# Altium PCB pll_layout.PcbDoc
Units mm, origin at the board's own origin, x right, y up, seen from the top; angles counter-clockwise.
Board outline 90.2 x 57.63 mm, 2 copper layers (Top Layer, Bottom Layer); 46 components, 26 nets, 131 pads, 180 vias.
Unrouted connection lines stored in the file: 1.
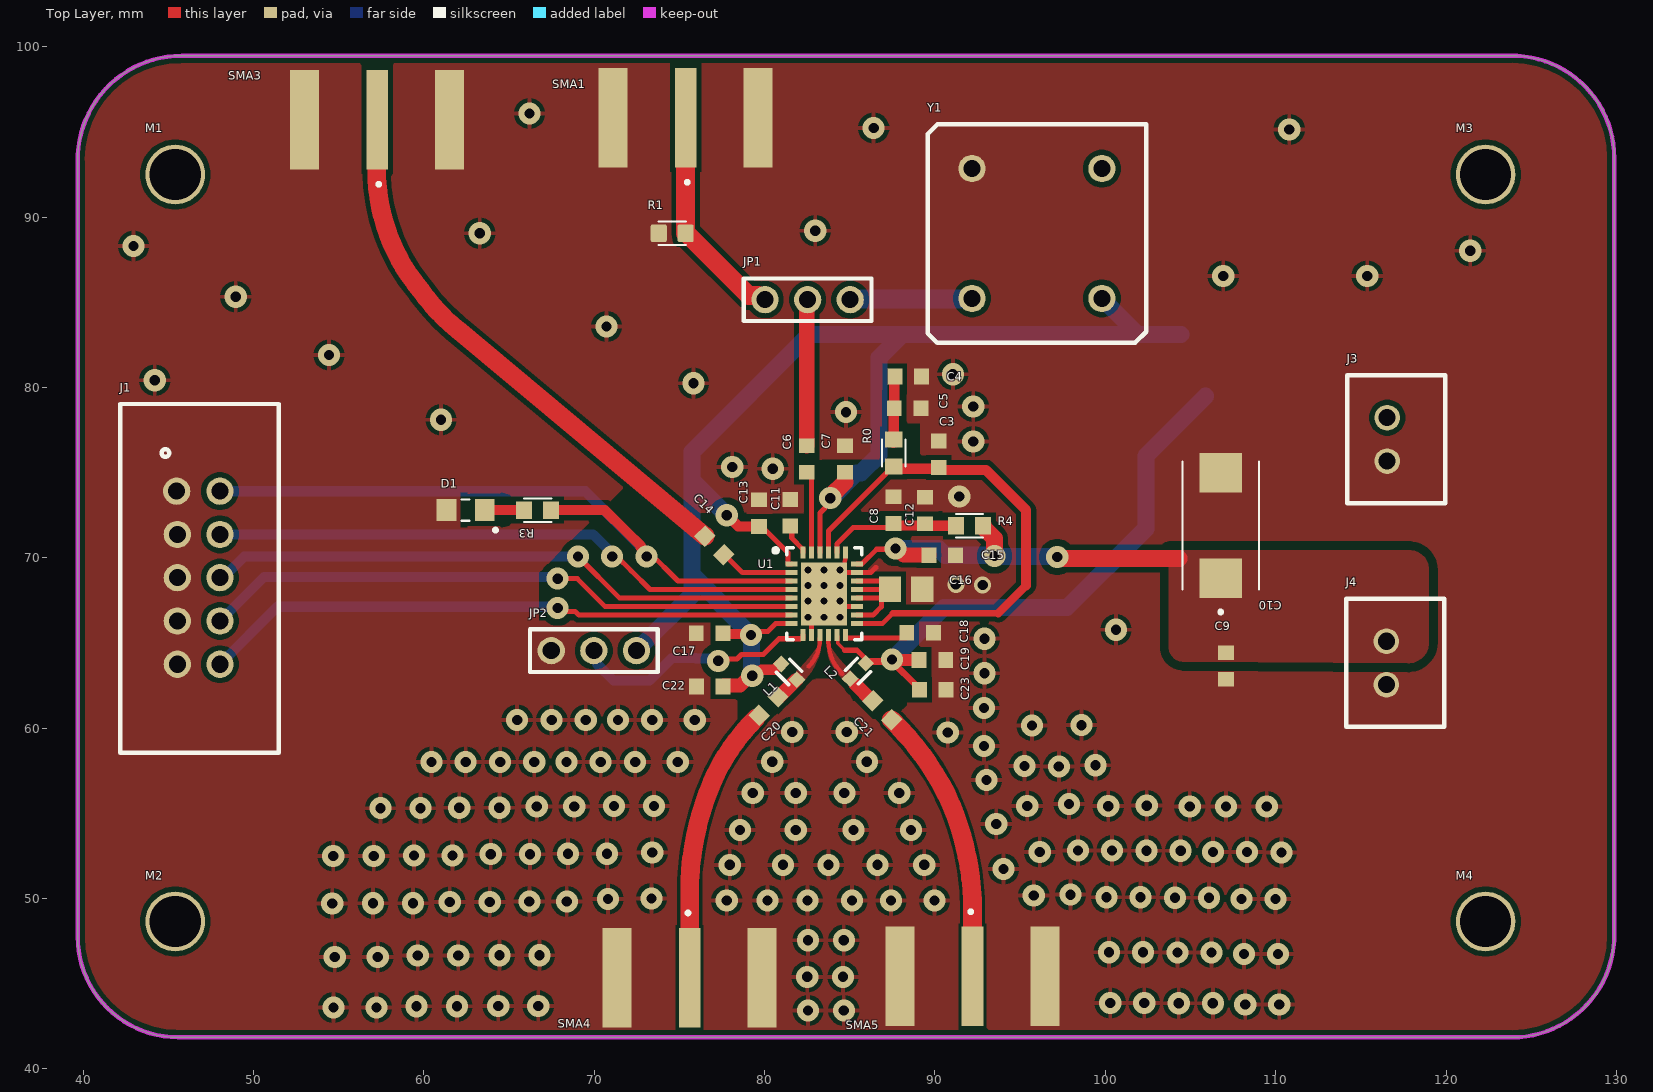
[diagram p0: Top Layer view]
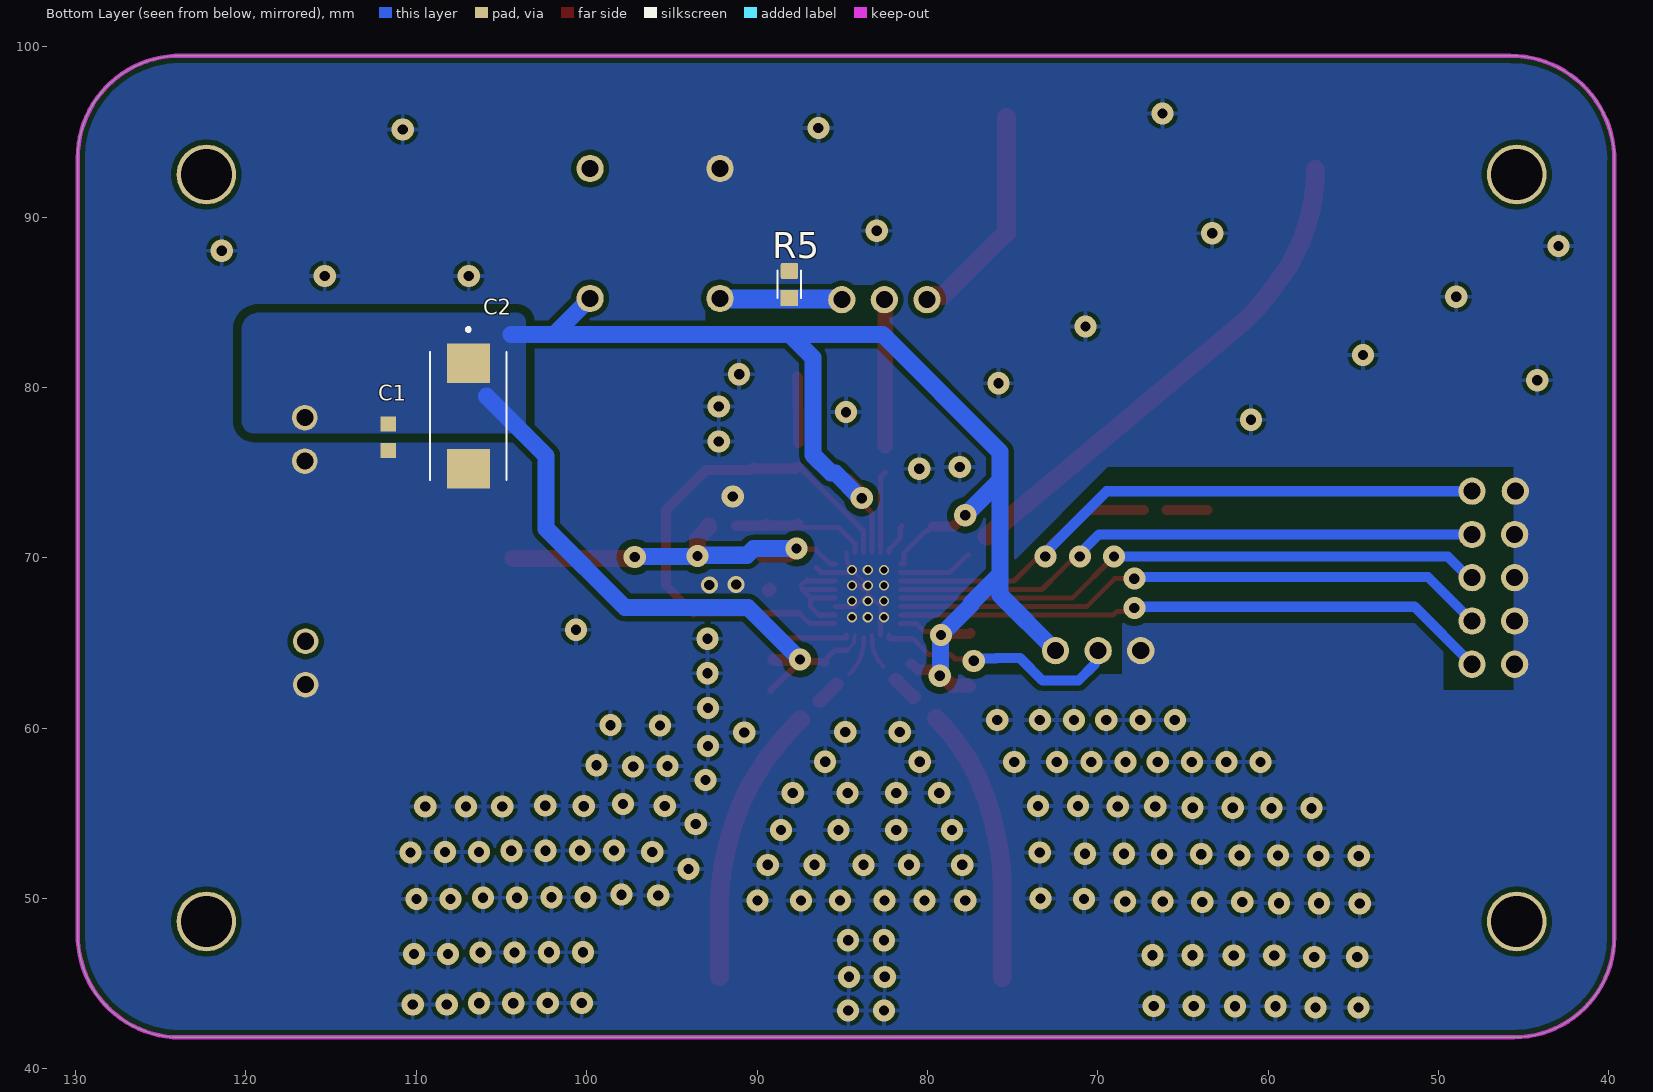
[diagram p1: Bottom Layer view, seen from below]
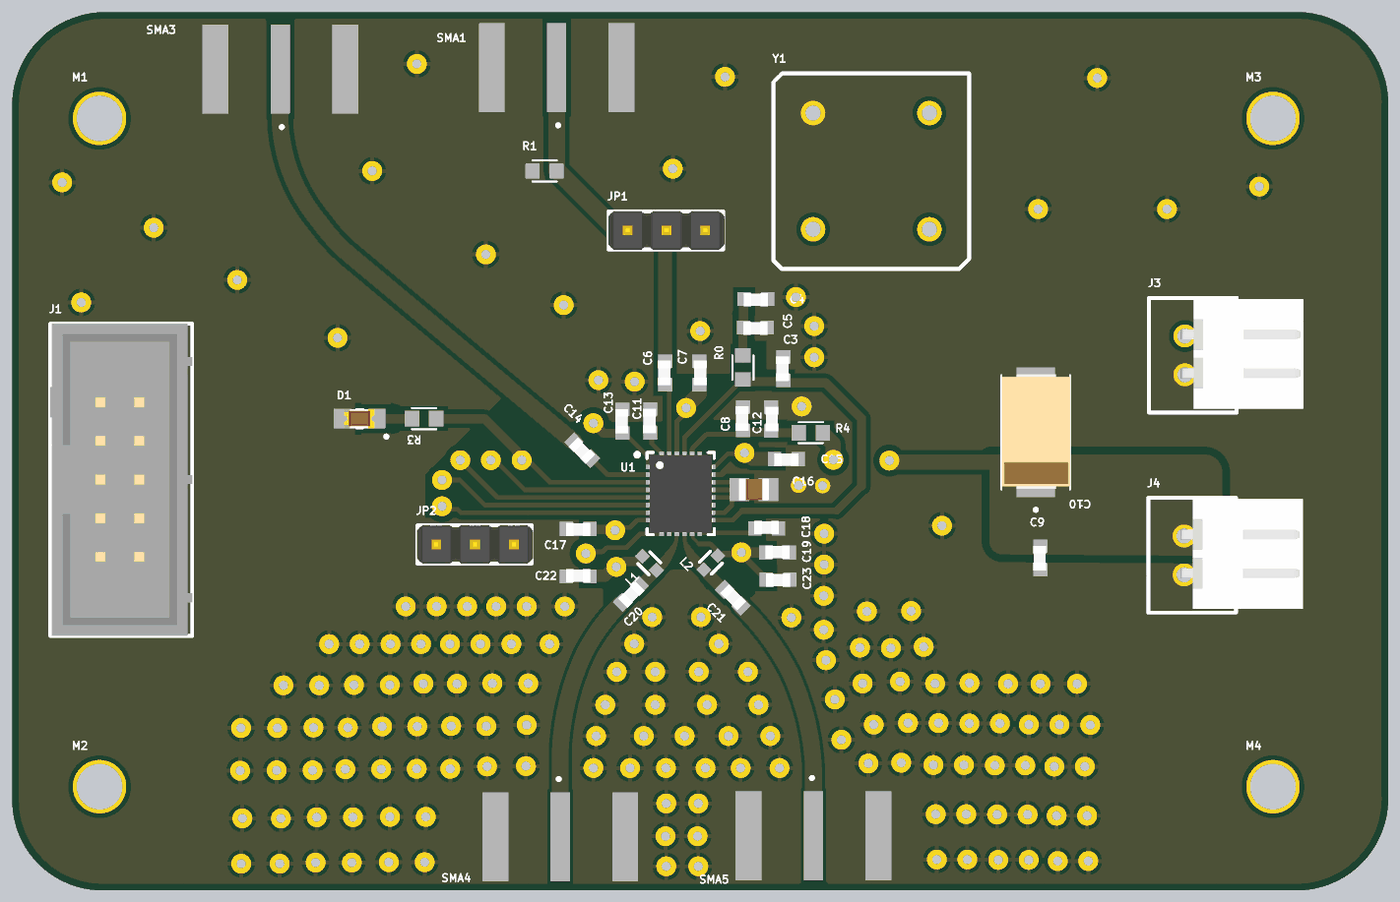
[diagram p2: 3D render of the assembled board from above, using the file's embedded part models]

## Layer stack, top to bottom
Top Solder: solder mask 0.0102, Solder Resist, Dk 3.5
Top Layer: signal copper 0.0356
Dielectric 1: dielectric 0.32, FR-4, Dk 4.8
Bottom Layer: signal copper 0.0356
Bottom Solder: solder mask 0.0102, Solder Resist, Dk 3.5

## Board outline
45.575,41.85 cw(c45.575,47.75) 39.675,47.75 39.675,93.275 39.676,93.269 cw(c45.775,93.375) 45.775,99.475 122.475,99.475 123.775,99.475 cw(c123.88,93.476) 129.88,93.476 129.875,93.475 129.875,47.95 cw(c123.876,47.845) 123.876,41.845 123.875,41.85

## Design rules (kind name [scope] priority, off if disabled: settings)
Clearance C21_1_Clearance [InNet('NetC21_1') vs OnLayer('Top Layer')] p1: gap=0.2 ignorepadtopadclearanceinfootprint=TRUE
Clearance C20_1_Clearance [InNet('NetC20_1') vs OnLayer('Top Layer')] p2: gap=0.2 ignorepadtopadclearanceinfootprint=TRUE
Clearance Clearance_1 [InNamedPolygon('NETC21_2_L01_P004')] p3: gap=0.3 ignorepadtopadclearanceinfootprint=TRUE
Clearance clear_rf [InNamedPolygon('NETC20_2_L01_P002')] p4: gap=0.3 ignorepadtopadclearanceinfootprint=TRUE
Clearance STD_Clearance [All] p5: gap=0.3 ignorepadtopadclearanceinfootprint=TRUE except(0.2: Arc-Arc Arc-Track Arc-SMDPad Arc-THPad Arc-Text Track-Track Track-SMDPad Track-THPad Track-Text SMDPad-THPad SMDPad-Text THPad-THPad THPad-Text Via-Text Fill-Text Poly-Text Region-Text Text-Text; 0.4: Via-Fill Via-Poly Via-Region; 0.5: SMDPad-SMDPad Fill-Fill Fill-Poly Fill-Region Poly-Poly Poly-Region Region-Region)
HoleSize [All] p1: absolutevalues=TRUE maxlimit=3.5 minlimit=0.4 maxpercent=80.000 minpercent=20.000
PlaneClearance [All] p1: clearance=0.6
PolygonConnect [All] p1: connectstyle=Direct reliefconductorwidth=0.254 reliefentries=4 polygonreliefangle="90 Angle" airgapwidth=0.254
RoomDefinition pll_schematic [InComponentClass('pll_schematic')] p1: confinementstyle=ConfineOut formatcopy=TRUE lockcomponents=FALSE outline 0,0 50.8,0 50.8,25.4 0,25.4
RoutingVias [All] p1: holewidth=0.6 width=0.6 viastyle="Through Hole" minholewidth=0.2 minwidth=0.5 maxholewidth=4 maxwidth=1.6
SolderMaskExpansion [All] p1: expansion=0 istentingtop=FALSE
Width [All] p1: maxlimit=2 minlimit=0.2 preferedwidth=0.254 minimp=50.000000 maximp=50.000000 favimp=50.000000
28 further rules are at their usual default settings.

## Components (designator, comment, footprint, x,y, rotation, side; value= is the part's Value field where it differs from the comment)
C1 "1uF" C0603 111.65,77.075 r90 bottom
C2 "330uF" C_TANT_D 106.95,78.325 r270 bottom
C3 "2.7nF" C0603 90.225,76.075 r270 top
C4 "22nF" C0603 88.43,80.65 r0 top
C5 "6.8nF" C0603 88.395,78.775 r0 top
C6 "1uF" C0603 82.475,75.8 r270 top
C7 "10nF" C0603 84.725,75.8 r90 top
C8 "1uF" C0603 87.575,72.8 r270 top
C9 "1uF" C0603 107.075,63.65 r270 top
C10 "330uF" C_TANT_D 106.775,71.9 r90 top
C11 "1uF" C0603 81.5,72.645 r270 top
C12 "10nF" C0603 89.425,72.775 r90 top
C13 "100nF" C0603 79.675,72.625 r270 top
C14 "22nF" C0603 77.048,70.727 r315 top
C15 "10nF" C0603 90.425,70.15 r0 top
C16 "2.2uF" C0805 88.3,68.15 r0 top
C17 "100nF" C0603 76.77,65.575 r0 top
C18 "1uF" C0603 89.125,65.6 r180 top
C19 "10nF" C0603 89.85,64 r180 top
C20 "100pF" C0603 80.225,61.3 r45 top
C21 "100pF" C0603 86.9,61.05 r135 top
C22 "100nF" C0603 76.775,62.45 r180 top
C23 "100nF" C0603 89.875,62.25 r0 top
D1 "-" D0805 62.45,72.8 r180 top
J1 "-" IDC-2x05 48.025,63.75 r180 top
J3 "-" JST_XH_1X02 116.55,76.95 r0 top
J4 "-" JST_XH_1X02 116.5,63.825 r0 top
JP1 "-" PIN_HEADER_1x03 82.525,85.15 r270 top
JP2 "-" PIN_HEADER_1x03 69.975,64.55 r270 top
L1 "68nH" L0402 81.44,63.31 r315 top
L2 "68nH" L0402 85.475,63.35 r45 top
M1 "MOUNTING_HOLE" MOUNTING_HOLE_NP_M3 45.4,92.5 r0 top
M2 "MOUNTING_HOLE" MOUNTING_HOLE_NP_M3 45.4,48.65 r0 top
M3 "MOUNTING_HOLE" MOUNTING_HOLE_NP_M3 122.325,92.5 r0 top
M4 "MOUNTING_HOLE" MOUNTING_HOLE_NP_M3 122.325,48.65 r0 top
R0 "453R" R0603#1 87.575,76.15 r270 top
R1 "51.1R" R0603#2 74.575,89.05 r0 top
R3 "330R" R0603#1 66.675,72.8 r0 top
R4 "15R" R0603#1 92.025,71.875 r0 top
R5 "51.1R" R0603#3 88.1,86.05 r90 bottom
SMA1 "-" SMA 75.362,95.843 r180 top
SMA3 "-" SMA 57.25,95.725 r180 top
SMA4 "-" SMA 75.6,45.35 r0 top
SMA5 "-" SMA 92.2,45.425 r0 top
U1 "LTC6946" QFN50P400X500X80_HS-29N_2 83.494,67.882 r0 top
Y1 "-" XOSC 95.975,89.025 r180 top

## Footprints (in the part's own frame and the unit in brackets; to place one, negate y for a bottom-side part, rotate by r counter-clockwise, add the part's x,y. Pads: shape width x height; smd on the part's side, far side on the other; paste and mask are expansions set on the pad)
C0603 [mm]
  rect 0.87x0.93 smd: 1(-0.78,0) 2(0.78,0)
  body extent -0.8,-0.48 0.8,0.38, height 0.83
C0805 [mm]
  rect 1.3x1.5 smd: 1(-0.95,0) 2(0.95,0)
  body extent -1,-0.72 1,0.73, height 1.22
C_TANT_D [mm]
  rect 2.31x2.52 smd: 1(-3.1,0) 2(3.1,0)
  silkscreen extent -5.18,-2.25 3.75,2.25, body extent -3.7,-2.27 3.8,2.22, height 3.15
D0805 [mm]
  rect 1.15x1.3 smd: A(-1.125,0) C(1.125,0)
  silkscreen extent -1.85,-0.63 0.23,1.27, body extent -0.97,-0.62 1.03,0.63, height 1.1
IDC-2x05 [mm]
  round 1.6 hole 1: 1(2.54,-10.16) 2(0,-10.16) 3(2.5,-7.62) 4(0,-7.62) 5(2.5,-5.08) 6(0,-5.08) 7(2.5,-2.54) 8(0,-2.54) 9(2.5,0) 10(0,0)
  silkscreen extent -3.45,-15.28 5.85,5.2, body extent -3.45,-15.3 5.85,5.2, height 9.1
JST_XH_1X02 [mm]
  round 1.5 hole 1: 1(0,1.275) 2(0,-1.275)
  silkscreen extent -2.35,-3.75 3.4,3.77, body extent -0.25,-3.51 7.79,3.71, height 5.84
L0402 [mm]
  rect 0.7x0.7 smd: 1(-0.65,0) 2(0.65,0)
  silkscreen extent -0.5,-0.55 0.5,0.55
MOUNTING_HOLE_NP_M3 [mm]
  round 3.5 hole 3: 1(0,0)
PIN_HEADER_1x03 [mm]
  round 1.6 hole 1: 1(0,2.5) 2(0,0) 3(0,-2.5)
  silkscreen extent -1.25,-3.75 1.25,3.75, body extent -1.27,-3.77 1.27,3.85, height 9.5
QFN50P400X500X80_HS-29N_2 [mm] "QFN, 28-Leads, Body 4.00x5.00mm, Pitch 0.50mm, Thermal Pad 2.70x3.70mm, IPC Medium Density"
  rect 0.7x0.3 smd: 1(-1.925,1.75) 2(-1.925,1.25) 3(-1.925,0.75) 4(-1.925,0.25) 5(-1.925,-0.25) 6(-1.925,-0.75) 7(-1.925,-1.25) 8(-1.925,-1.75) 15(1.925,-1.75) 16(1.925,-1.25) 17(1.925,-0.75) 18(1.925,-0.25) 19(1.925,0.25) 20(1.925,0.75) 21(1.925,1.25) 22(1.925,1.75)
  rect 0.3x0.7 smd: 9(-1.25,-2.425) 10(-0.75,-2.425) 11(-0.25,-2.425) 12(0.25,-2.425) 13(0.75,-2.425) 14(1.25,-2.425) 23(1.25,2.425) 24(0.75,2.425) 25(0.25,2.425) 26(-0.25,2.425) 27(-0.75,2.425) 28(-1.25,2.425)
  rect 2.7x3.7 smd: 29(0,0)
  silkscreen extent -2.97,-2.7 2.2,2.7, body extent -2.1,-2.6 2.1,2.6, height 0.8
R0603#1 [mm]
  rect 0.94x1.02 smd: 1(-0.79,0) 2(0.79,0)
  silkscreen extent -0.8,-0.69 0.8,0.69
R0603#2 [mm]
  rrect20% 0.94x1.02 smd: 1(-0.79,0) 2(0.79,0)
  silkscreen extent -0.8,-0.69 0.8,0.69
R0603#3 [mm]
  rect 0.94x1.02 smd: 1(-0.79,0)
  rrect20% 0.94x1.02 smd: 2(0.79,0)
  silkscreen extent -0.8,-0.69 0.8,0.69
SMA [mil]
  rect 50x230 smd: 1(0,0)
  rect 67x230 smd: 2(-167.5,0) 2(167.5,0)
  silkscreen extent -8,146 0,154
XOSC [mm]
  round 1.6 hole 1: 1(-3.825,-3.825) 4(3.8,-3.825) 5(3.8,3.8) 8(-3.825,3.8)
  silkscreen extent -6.43,-6.43 6.4,6.4

## Part data
C1 C3 C4 C5 C6 C7 C8 C9 C11 C12 C13 C14 C15 C16 C17 C18 C19 C20 C21 C22 C23: library part C
C2 C10: library part CP
D1: library part LED
J1: library part Conn_Gene_1x10
J3 J4: library part Conn_Gene_1x02
JP1 JP2: library part "Pin Header 1x03"
L1 L2: library part L
M1 M2 M3 M4: "Non-Plated"
R0 R1 R3 R4 R5: library part R
SMA1 SMA3 SMA4 SMA5: library part SMA
U1: library part LTC6946IUFD-1#PBF-ND, ComponentLink1Description=LTC6946, ComponentLink1URL=https://www.digikey.com/en/products/detail/analog-devices-inc/LTC6946IUFD-1-PBF/2756832
Y1: library part OSC

## Via types
v1: diameter 1.3, hole 0.6, Top Layer to Bottom Layer, 166 vias
v2: diameter 0.6, hole 0.4, Top Layer to Bottom Layer, 12 vias
v3: diameter 1, hole 0.6, Top Layer to Bottom Layer, 2 vias

## Nets (pads, with @x,y where several pads share a name; then routed paths per layer and width w, separated by ;. In a path a pad name is that pad's centre, name@x,y a point inside that pad or via, vN(x,y) a via of type N, cw(c..) or ccw(c..) an arc to the next point about the centre after c; other vN are vias at no path point)
3.3V: C1.2 C2.1 C7.1 C13.2 C17.2 C19.2 C22.1 C23.1 J3.1 JP2.1 L1.1 L2.2 U1.1 U1.8 U1.13 U1.26 Y1.8 | length 123.6
  Top Layer w0.2: U1.13 84.294,65.407 84.294,64.981 84.7,64.575 ; C19.2@89.032,64.037 C19.2
  Top Layer w0.3: v1(79.2,65.475) 79.391,65.666 80.181,65.666 80.646,66.131 U1.8 ; C13.2@79.825,71.725 79.99,71.56 80.11,71.56 81.369,70.301 81.369,69.631 U1.1 ; U1.26 83.244,72.624 83.85,73.229 v1(83.85,73.5) ; 84.7,64.575 85.425,64.575 85.935,64.065 L2.2
  Top Layer w0.4: L2.2 86.147,63.81 86.247,63.91 87.36,63.91 v1(87.475,64.025) 87.475,63.92 88.93,62.465 88.96,62.465 89.195,62.23 C23.1@89.195,62.2
  Top Layer w0.6: C17.2@77.47,65.575 77.52,65.525 79.15,65.525 v1(79.2,65.475) ; v1(77.775,72.5) 77.795,72.5 78.45,71.845 C13.2 ; v1(79.275,63.075) 79.464,63.075 79.814,63.425 80.566,63.425 80.91,63.769 L1.1
  Top Layer w0.7: v1(87.475,64.025) 87.487,64.013 89.008,64.013 C19.2@89.032,64.037
  Top Layer w0.8: C22.1 77.555,62.465 77.59,62.5 78.565,62.5 79.14,63.075 v1(79.275,63.075)
  Top Layer w1: v1(83.85,73.5) 83.85,73.581 84.725,74.456
  Bottom Layer w1: JP2.1 75.75,67.825 75.75,69.025 ; v1(77.775,72.5) 75.75,74.525 ; v1(79.275,63.075) 79.237,63.113 79.237,65.437 77.446,67.229 77.446,67.329 75.75,69.025 ; v1(83.85,73.5) 83.931,73.5 85.403,74.972 85.647,74.972 86.725,76.05 86.725,81.75 88.075,83.1 ; v1(87.475,64.025) 90.525,67.075 97.75,67.075 102.375,71.7 102.375,75.975 105.884,79.484 ; Y1.8 101.925,83.1 ; 104.45,83.1 101.925,83.1 ; 75.75,69.025 75.75,74.525 ; 75.75,74.525 75.75,76.225 82.625,83.1 88.075,83.1 ; 88.075,83.1 101.925,83.1
5V: C9.1 C10.1 C15.1 J4.1 R4.2 U1.22 | length 23.7
  Top Layer w0.3: U1.22 85.705,69.631 86.577,70.504 87.629,70.504 v1(87.677,70.552)
  Top Layer w0.9: v1(87.677,70.552) 87.785,70.552 88.172,70.165 89.63,70.165 C15.1
  Top Layer w1: R4.2@92.845,71.865 92.845,71.78 93.492,71.133 93.492,70.108 v1(93.5,70.1) ; v1(97.175,70.05) 97.232,69.993 97.445,69.993 97.487,69.95 104.329,69.95
  Bottom Layer w1: v1(87.677,70.552) 90.198,70.552 90.6,70.15 93.45,70.15 93.525,70.075 97.15,70.075 v1(97.175,70.05)
CP: C3.2 R0.2 U1.15 U1.25 | length 30.6
  Top Layer w0.3: U1.25 83.744,71.569 87.335,75.16 R0.2@87.41,75.16 ; U1.15 86.906,66.131 87.525,66.75
  Top Layer w0.4: 87.525,66.75 93.725,66.75
  Top Layer w0.5: 93.725,66.75 95.35,68.375
  Top Layer w0.6: R0.2 87.71,75.225 90.155,75.225 C3.2 90.36,75.16 90.731,75.16 90.741,75.15 93,75.15 95.35,72.8 95.35,68.375
CS': J1.4 U1.4 | length 34.9
  Top Layer w0.3: v1@71.05,70.25 71.146,70.25 71.661,69.735 71.665,69.735 72.167,69.233 73.268,68.131 U1.4
  Bottom Layer w0.4: J1.4 J1.4@48.06,71.335
  Bottom Layer w0.6: J1.4@48.06,71.335 48.095,71.37 69.93,71.37 v1@71.05,70.25
  other v1: 71.05,70.075
GND: C1.1 C2.2 C3.1 C4.2 C5.2 C7.2 C8.1 C9.2 C10.2 C11.1 C12.2 C13.1 C15.2 C16.2 C17.1 C18.1 C19.1 C22.2 C23.2 D1.C J1.1 J1.3 J1.5 J1.7 J1.9 J3.2 J4.2 JP2.3 R1.1 R5.2 SMA1.2 SMA3.2 SMA4.2 SMA5.2 U1.10 U1.17 U1.21 U1.23 U1.29 Y1.4 | length 10.5
  Top Layer w0.2: U1.29@82.744,66.507 82.744,67.131 U1.29 ; U1.29@84.244,67.131 U1.29 ; v2(84.419,69.281) 84.394,69.281 v2(83.494,68.381) U1.29
  Top Layer w0.254: v2(84.419,69.281) ccw(c83.635,70.066) 84.546,69.433 ccw(c83.635,70.066) 84.744,70.066 U1.23
  Top Layer w0.3: U1.10 U1.29@82.744,66.507 ; U1.29@83.744,68.131 U1.29@84.207,68.594 ; U1.29@84.244,67.131 U1.17 ; U1.29@84.719,69.132 86.231,69.132 86.527,69.427
  Top Layer w0.8: C16.2 C16.2@89.309,68.091
  other v1: 82.55,43.425 84.65,43.425 54.687,43.597 57.212,43.597 59.562,43.672 61.937,43.672 64.362,43.697 66.712,43.697 108.213,43.772 110.213,43.772 104.313,43.847 106.313,43.847 100.288,43.872 102.288,43.872 82.5,45.4 84.6,45.4 54.762,46.572 57.287,46.572 59.637,46.647 62.012,46.647 64.437,46.672 66.787,46.672 108.138,46.747 110.138,46.747 104.238,46.822 106.238,46.822 100.213,46.847 102.213,46.847 82.55,47.55 84.65,47.55 54.614,49.699 57.014,49.724 59.364,49.724 61.514,49.799 63.864,49.799 66.189,49.824 68.389,49.824 77.775,49.875 80.175,49.875 82.525,49.875 85.125,49.875 87.425,49.875 89.975,49.875 107.988,49.972 109.988,49.972 70.802,49.977 73.352,50.002 104.088,50.047 106.088,50.047 100.063,50.072 102.063,50.072 95.8,50.175 97.95,50.225 94.027,51.727 77.95,51.975 81.075,51.975 83.75,51.975 86.625,51.975 89.375,51.975 54.675,52.501 57.05,52.501 59.425,52.526 61.675,52.526 63.925,52.601 66.225,52.601 68.45,52.626 70.75,52.626 73.4,52.7 110.348,52.699 96.148,52.723 106.323,52.724 108.323,52.724 102.423,52.799 104.423,52.799 98.398,52.824 100.398,52.824 78.55,54.025 81.825,54.025 85.225,54.025 88.598,54.025 93.6,54.375 57.452,55.302 59.802,55.302 62.077,55.327 64.427,55.327 66.627,55.402 68.827,55.402 104.958,55.4 107.083,55.4 109.477,55.4 71.152,55.427 73.502,55.427 95.418,55.422 100.173,55.42 102.428,55.449 97.875,55.547 79.3,56.189 81.825,56.189 84.68,56.189 87.902,56.189 93.018,56.948 97.273,57.748 95.248,57.773 99.425,57.825 60.451,58.008 62.451,58.008 64.476,58.008 66.476,58.008 68.376,58.008 70.376,58.008 72.401,58.008 74.901,58.008 80.45,58.025 86,58.025 92.873,58.948 90.75,59.75 81.625,59.777 84.822,59.777 95.7,60.15 98.6,60.175 65.473,60.477 67.498,60.477 69.498,60.477 71.398,60.477 73.398,60.477 75.898,60.477 92.875,61.175 92.9,63.225 92.9,65.25 100.625,65.775 91.425,73.6 80.475,75.225 78.1,75.325 92.25,76.825 61,78.1 84.775,78.55 92.25,78.875 75.825,80.25 44.2,80.425 91.05,80.775 54.425,81.9 70.725,83.575 48.95,85.325 106.925,86.55 115.375,86.55 121.425,88.025 42.95,88.3 63.275,89.05 82.975,89.2 110.8,95.15 86.4,95.225 66.2,96.075
  other v2: 82.544,66.507 83.494,66.507 84.419,66.507 82.544,67.456 83.494,67.456 84.419,67.456 82.544,68.381 84.419,68.381 82.544,69.281 83.494,69.281
  other v3: 92.8,68.4 91.225,68.425
MUTE': JP2.2 U1.9 | length 14.7
  Top Layer w0.3: v1(77.275,63.95) 77.386,64.061 78.375,64.061 78.639,64.325 79.925,64.325 80.85,65.25 82.069,65.25 82.075,65.256 82.244,65.256 U1.9
  Bottom Layer w0.6: JP2.2 70.166,64.359 70.166,63.759 71.125,62.8 73.25,62.8 74.575,64.125 75.942,64.125 75.983,64.084 77.141,64.084 v1(77.275,63.95)
NetC4_1: C4.1 C5.1 R0.1 | length 3.9
  Top Layer w0.6: R0.1@87.575,76.74 87.575,78.678 cw(c87.712,78.678) C5.1 87.615,80.566 cw(c87.735,80.566) C4.1
NetC6_2: C6.2 U1.27 | length 4.6
  Top Layer w0.27: U1.27@82.75,70.575 C6.2@82.75,74.745
  Top Layer w0.29: U1.27 U1.27@82.749,70.311
  Top Layer w0.3: C6.2 C6.2@82.75,74.745
NetC8_2: C8.2 C12.1 R4.1 U1.24 | length 7.9
  Top Layer w0.3: U1.24 84.244,70.819 85.2,71.775 C8.2@87.395,71.775
  Top Layer w0.6: C8.2 87.695,71.9 89.33,71.9 C12.1 89.545,71.875 R4.1
NetC11_2: C11.2 U1.28 | length 1.9
  Top Layer w0.3: C11.2 81.595,71.77 81.595,71.156 82.244,70.507 U1.28
NetC14_1: C14.1 SMA3.1 | length 29.8
  Top Layer w1.1: SMA3.1@57.223,92.808 ccw(c68.206,92.788) 59.796,85.724 cw(c58.953,85.018) 59.848,85.656 ccw(c69.326,92.418) 61.956,83.405 ; 61.956,83.405 C14.1
NetC16_1: C16.1 U1.16 U1.18 U1.19 U1.20 | length 8.8
  Top Layer w0.254: C16.1@87.046,68.756 87.448,68.354 C16.1@87.146,68.656
  Top Layer w0.3: U1.16 86.356,66.631 86.85,67.125 C16.1@86.85,67.65 ; U1.18 C16.1@86.85,67.631 ; U1.19 C16.1@87.35,68.131 ; U1.20 C16.1@87.046,68.631 ; C16.1@86.894,67.694 87.006,67.806 C16.1
NetC18_2: C18.2 U1.14 | length 3.8
  Top Layer w0.3: U1.14 84.744,65.3 88.295,65.3 C18.2@88.345,65.35
NetC20_1: C20.1 SMA4.1 | length 16.2
  Top Layer w1.1: SMA4.1 75.6,51.014 cw(c92.539,50.235) 77.158,57.373 cw(c88.469,51.615) C20.1@79.477,60.573
NetC20_2: C20.2 L1.2 U1.11 | length 3.5
  Top Layer w0.25: U1.11@83.244,65.231 U1.11
  Top Layer w0.255: 82.584,63.616 ccw(c80.991,65.209) U1.11@83.244,65.231
  Top Layer w0.8: C20.2 80.798,61.83 80.847,61.83 81.105,62.088 81.113,62.088 L1.2@81.875,62.85
NetC21_1: C21.1 SMA5.1 | length 16.4
  Top Layer w1.1: C21.1 cw(c75.878,48.597) 90.676,56.121 cw(c89.696,55.622) 90.693,56.086 cw(c75.73,49.162) 92.2,49.92 SMA5.1
NetC21_2: C21.2 L2.1 U1.12 | length 3.8
  Top Layer w0.255: U1.12@83.744,65.344 ccw(c86.522,65.166) 84.557,63.195
  Top Layer w0.8: 85.315,62.585 86.299,61.601 C21.2@86.348,61.601
NetD1_A: D1.A R3.1 | length 2.4
  Top Layer w0.6: D1.A@63.55,72.8 R3.1@65.962,72.8
REF+: C6.1 JP1.2 | length 8.6
  Top Layer w0.9: C6.1 82.475,85.1 JP1.2
REF-EX: JP1.3 R1.2 SMA1.1 | length 12.9
  Top Layer w1.1: R1.2@75.362,89.053 SMA1.1 ; R1.2@75.465,89.01 79.075,85.4 79.64,85.4 79.89,85.15 JP1.3
REF-IN: JP1.1 R5.1 Y1.5 | length 7.2
  Top Layer w1.1: JP1.1 JP1.1@85.062,85.188 ; Y1.5@92.137,85.188 Y1.5
  Bottom Layer w1.1: JP1.1@85.062,85.188 Y1.5@92.137,85.188
REFO: C14.2 U1.2 | length 4.4
  Top Layer w0.3: C14.2 77.65,70.175 78.694,69.132 U1.2
SCLK: J1.6 U1.5 | length 35.1
  Top Layer w0.3: v1(69.05,70.075) 71.494,67.631 U1.5
  Bottom Layer w0.6: J1.6 48.207,68.83 49.452,70.075 v1(69.05,70.075)
SDI: J1.8 U1.6 | length 35.3
  Top Layer w0.3: v1(67.85,68.775) 69,68.775 70.644,67.131 U1.6
  Bottom Layer w0.6: J1.8 50.61,68.875 67.75,68.875 v1(67.85,68.775)
SDO: J1.10 U1.7 | length 35.1
  Top Layer w0.3: v1(67.85,67.05) 68.041,66.859 68.873,66.859 69.1,66.631 U1.7
  Bottom Layer w0.6: J1.10 51.4,67.125 67.775,67.125 v1(67.85,67.05)
STAT: J1.2 R3.2 U1.3 | length 42.6
  Top Layer w0.3: v1@73.075,70.35 73.2,70.35 74.919,68.631 U1.3
  Top Layer w0.6: R3.2@67.295,72.8 70.625,72.8 71.883,71.542 72.725,70.7 72.725,70.614 72.989,70.35 v1@73.075,70.35
  Bottom Layer w0.6: J1.2 69.465,73.91 73.025,70.35 v1@73.075,70.35
  other v1: 73.075,70.075
pads on no net: M1.1 M2.1 M3.1 M4.1 Y1.1

## Polygon pours and split planes (outlines as drawn)
GND on Bottom Layer "GND_L02_P009" (solid, remove dead copper, pour order 9): 39.702,93.275 39.686,47.667 ccw(c45.805,48.012) 45.35,41.9 122.3,41.9 ccw(c123.475,48.173) 129.854,48.025 129.858,93.267 ccw(c123.727,93.267) 123.727,99.399 45.35,99.401 ccw(c45.694,93.417)
3.3V on Bottom Layer "3.3V_L02_P007" (solid, pour order 7): 103.575,83.85 103.575,77.3 119.525,77.3 ccw(c119.525,78.025) 120.25,78.025 120.25,83.4 ccw(c119.275,83.4) 119.275,84.375 104.1,84.375 ccw(c104.1,83.85)
NetC20_2 on Top Layer "NETC20_2_L01_P002" (solid, remove dead copper, pour order 2): 81.8,63.275 ccw(c75.455,70.124) 83.227,64.95 83.246,64.838 83.273,64.684 ccw(c84.904,65.014) 83.291,64.602 ccw(c84.785,64.199) 83.273,64.525 83.2,64.225 ccw(c84.853,63.425) 83.129,64.057 ccw(c88.991,61.15) 83.053,63.899 ccw(c89.518,60.892) 82.975,63.725 ccw(c85.581,62.569) 82.944,63.653 ccw(c89.591,60.017) 82.85,63.475 82.725,63.275 82.575,63.075 82.322,62.783
5V on Top Layer "5V_L01_P000" (solid, pour order 0): 103.725,70.45 103.725,64.778 ccw(c104.616,64.778) 104.61,63.887 117.75,63.8 ccw(c117.75,65.05) 119,65.05 119,69.276 ccw(c117.827,69.277) 117.826,70.45
NetC21_2 on Top Layer "NETC21_2_L01_P004" (solid, remove dead copper, pour order 4): 85.218,63.193 cw(c91.267,69.737) 83.75,64.95 83.725,64.775 83.698,64.712 cw(c81.92,64.841) 83.675,64.525 83.725,64.25 cw(c80.335,62.844) 83.85,63.9 cw(c80.135,61.979) 83.953,63.685 cw(c79.4,60.384) 84.123,63.437 84.35,63.106 84.777,62.658
GND on Top Layer "GND_L01_P006" (solid, remove dead copper, pour order 6): 39.675,93.732 39.702,47.464 ccw(c45.958,48.195) 45.709,41.902 123.579,41.902 ccw(c123.643,48.091) 129.832,48.025 129.832,93.732 ccw(c123.692,93.248) 123.975,99.4 45.906,99.401 ccw(c45.906,93.142)

## Keep-outs
Keep-Out Layer:
  lines w0.254: 39.675,93.275 39.675,47.75 ccw(c45.575,47.75) 45.575,41.85 ; 39.676,93.269 cw(c45.775,93.375) 45.775,99.475 122.475,99.475 123.775,99.475 cw(c123.88,93.476) 129.88,93.476 ; 45.55,41.85 123.875,41.85 ; 123.876,41.845 ccw(c123.876,47.845) 129.875,47.95 129.875,93.475

## Other copper
Top Layer:
  pour cut-out: 89.047,63.235 89.047,63.028 89.05,63.025 89.825,63.025 89.825,63.215 89.805,63.235
  pour cut-out: 90.47,72.492 90.195,72.492 90.195,72.67 90.255,72.73 90.47,72.73
  pour cut-out: 88.34,72.512 88.66,72.512 88.66,72.73 88.355,72.73 88.35,72.725
  pour cut-out: 86.656,60.87 86.4,60.614 86.4,60.6 86.41,60.6 86.532,60.477 86.717,60.661
  pour cut-out: 80.737,60.862 80.587,60.712 79.65,61.65 79.75,61.75 79.85,61.75 80.7,60.9
  pour cut-out: 80.44,72.58 80.445,72.575 80.725,72.575 80.725,71.85 80.45,71.85
  pour cut-out: 86.95,78 86.88,78.01 86.875,77.725 86.95,77.725
  pour cut-out: 65.025,71.875 65.025,72.275 64.525,72.275 64.525,71.775
  pour cut-out: 64.525,73.85 64.525,73.3 65.025,73.3 65.025,73.7
  pour cut-out: 88.375,79.775 88.125,79.775 88.125,79.65 88.375,79.65
  pour cut-out: 83.353,73.182 83.257,73.087 83.092,73.087 83.092,74.185 83.34,74.185 83.34,75.75 84,75.75 84,74.462
  pour cut-out: 85.496,75.75 85.496,74.185 85.431,74.185 85.431,73.865 85.389,73.823 85.461,73.751 85.496,73.751 86.694,74.948 86.694,75.75
  pour cut-out: 86.71,72.132 86.634,72.055 84.99,72.055 84.99,72.073 84.909,72.154 85.455,72.7 86.71,72.7
  pour cut-out: 77.425,69.125 71.822,74.197 66.75,69.125 66.75,66.3 77.425,66.3
  pour cut-out: 78.95,72.688 76.108,72.619 78.719,70.279 78.789,70.349 78.846,70.349 78.846,70.562 79.128,70.844 79.128,71.01 78.95,71.01
  pour cut-out: 83.429,63.95 82.842,62.969 82.961,62.85 83.001,62.89 83.955,62.89 84.068,63.004 83.5,63.95
  pour cut-out: 88.35,77.906 88.35,75.954 89.45,75.954 89.45,76.025 89.125,76.025 89.125,77.897
  pour cut-out: 87.105,79.64 87.105,79.785 86.875,79.785 86.875,79.64
  pour cut-out: 80.197,63.259 80.43,63.259 80.696,62.994 78.39,60.525 78.39,61.935 78.39,62.188
  pour cut-out: 85.961,62.776 86.437,63.252 86.465,63.224 86.799,63.224 88.29,61.733 88.36,61.733 88.36,61.335 88.125,61.1 88.073,61.1 86.37,62.804 86.152,62.586
  pour cut-out: 85.168,61.983 85.015,61.83 85.146,61.699 85.146,61.58 85.359,61.793
  pour cut-out: 62.129,73.704 62.129,73.85 62.575,73.85 62.575,71.75 62.129,71.75 62.129,71.896
  pour cut-out: 77.725,64.633 77.652,64.706 77.652,64.76 77.5,64.76 77.464,64.796 77.464,64.097 77.46,63.665 77.728,63.665 77.728,63.751 77.769,63.792
Bottom Layer:
  pour cut-out: 82.25,84.425 83.3,84.425 83.3,86 84.325,86 84.325,84.426 93,84.475 93,83.926 82.25,83.8
  pour cut-out: 77.174,65.115 78.375,65.115 78.375,63.175 71.454,63.175 70.818,63.903 71.029,64.685 71.421,64.685 72.068,63.568 72.882,63.568 73.457,64.143 73.529,64.629 74.015,65.115
  pour cut-out: 45.6,75.325 45.6,62.25 49.7,62.25 49.7,64.474 51.401,66.175 68.6,66.175 68.6,63.2 75.05,63.2 75.05,69.675 69.4,75.325

## Silkscreen, mask and mechanical layers (free items; w line width, h text height)
Mechanical 1:
  text "by EFE K. , FURKAN ASLAN H." at 127.663,63.954 h1 r90
  text "PLL_V1" at 127.754,55.979 h1 r90
  text "ANTEN OLCUM DUZENEGI  2021" at 125.871,55.854 h1 r90

## Text inside footprints (layer, text, board x,y; h text height)
SMA1: Mechanical 13 "PCB Edge" at 71.679,101.431 h1.27
SMA3: Mechanical 13 "PCB Edge" at 65.805,101.725 h1.27 r180
SMA4: Mechanical 13 "PCB Edge" at 70.838,39.699 h1.27
SMA5: Mechanical 13 "PCB Edge" at 87.501,39.519 h1.27